# EAGLE board nhb12 (EAGLE 5.08)
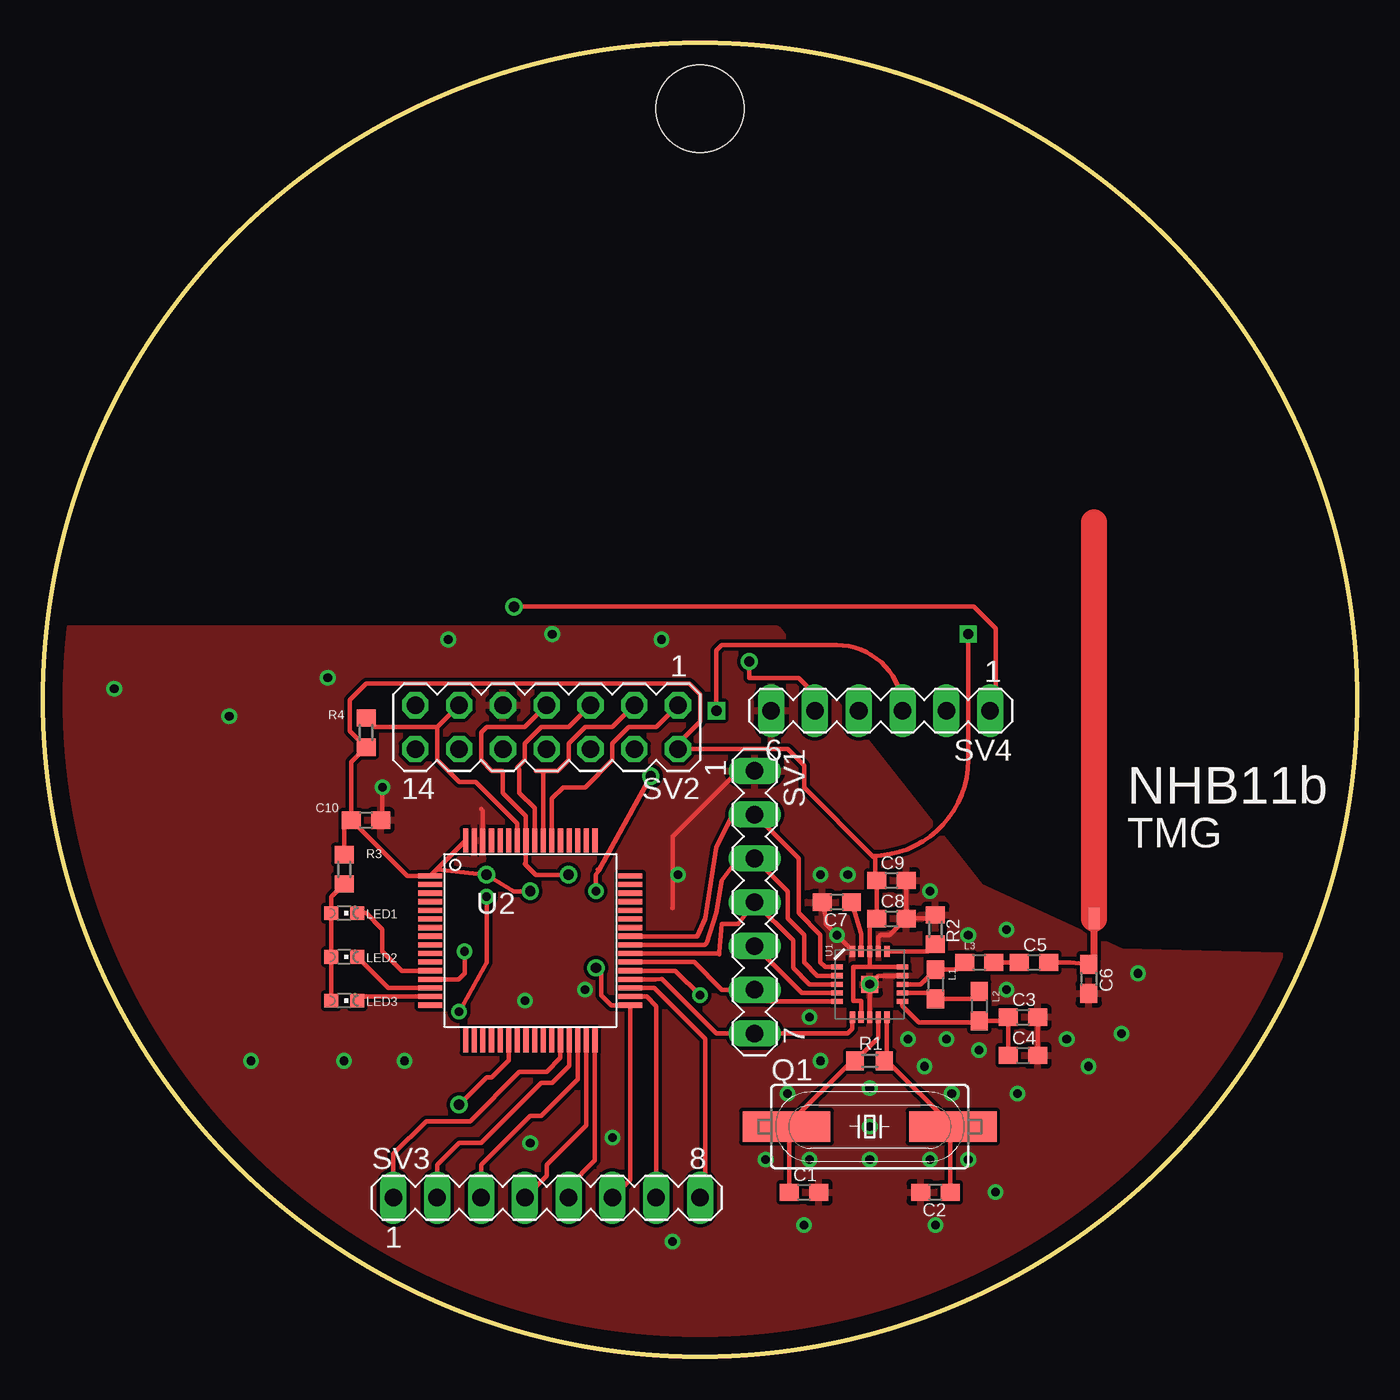
[diagram p0: board, top side]
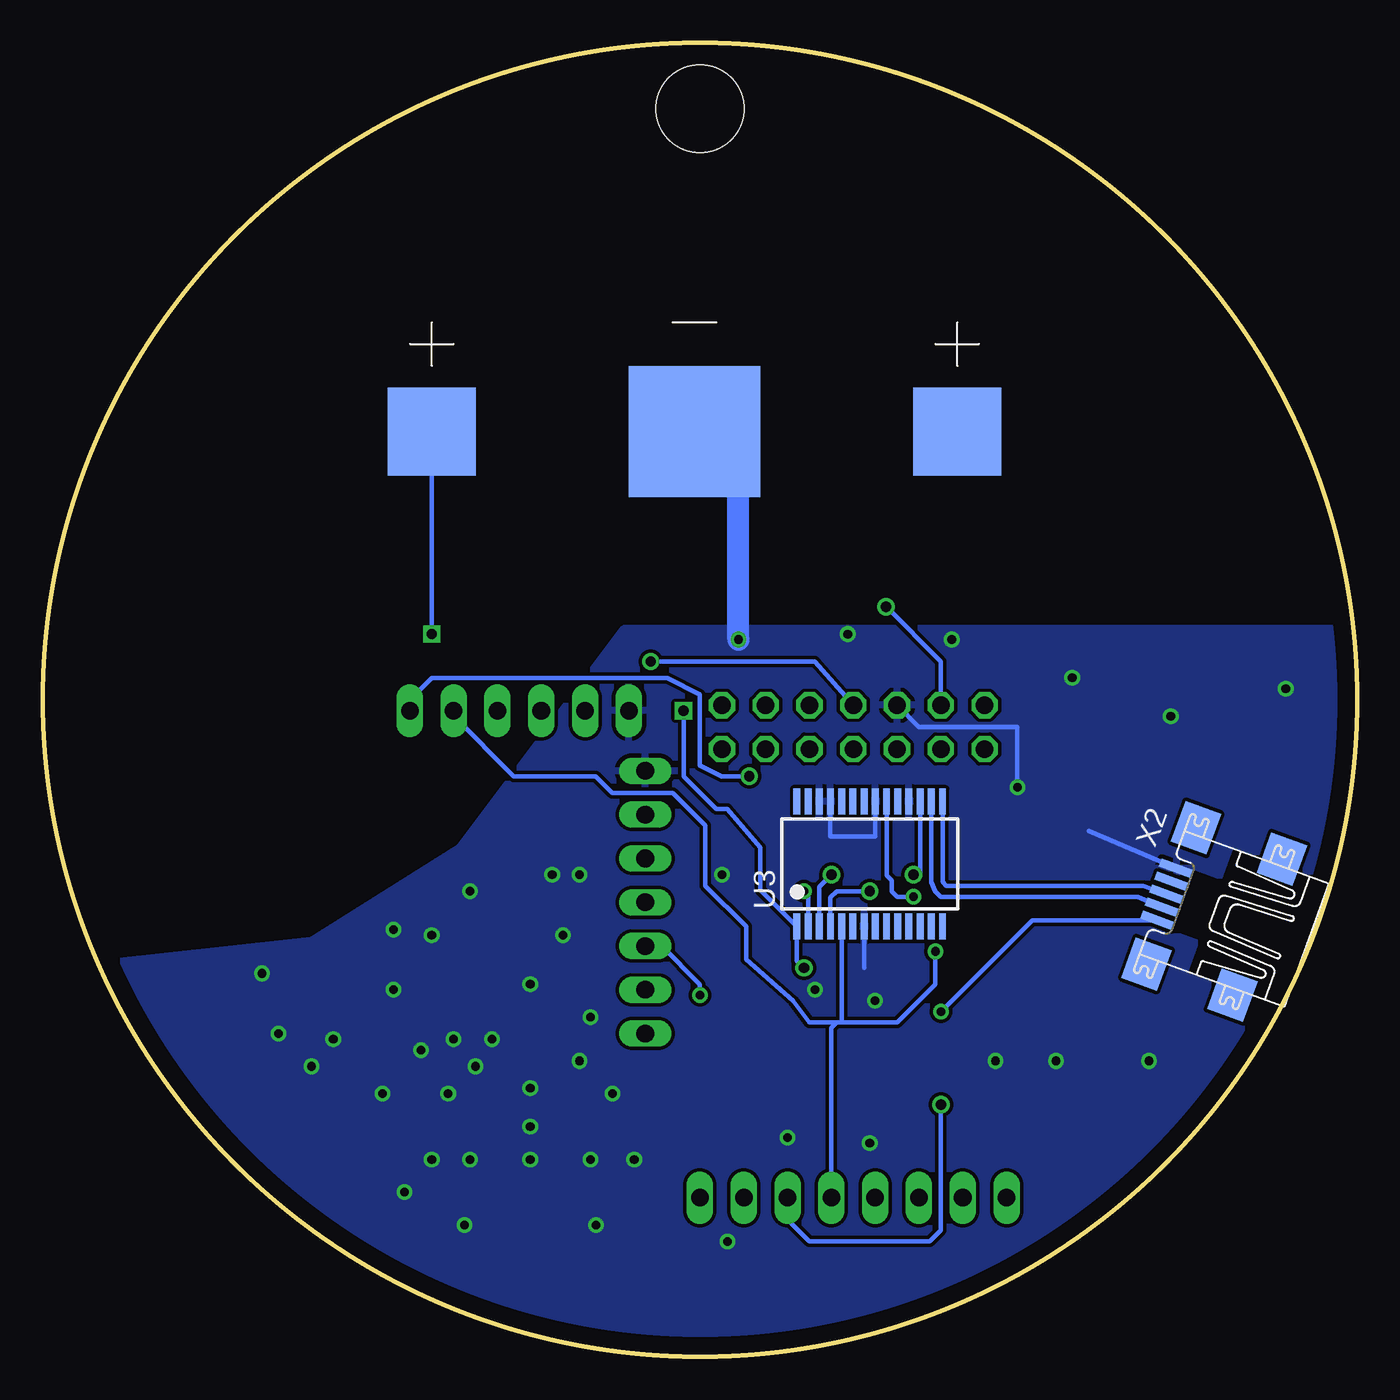
[diagram p1: board, bottom side, seen from below]

Size 76.2 x 76.2 mm. Coordinates in mm from the lower left corner, seen from the top.
Outline: circle at 38.1,38.1 radius 38.1
Copper layers (1*16): Top 0.035mm / dielectric 1.5mm / Bottom 0.035mm
Design rules "default *": minimum track width 10mil, minimum drill 8mil, track to track 8mil, track to pad 8mil, pad to pad 4mil, via to via 8mil, smd to smd 4mil, copper to edge 40mil, drill to drill 4mil, minimum pad ring 10mil, minimum via ring 8mil, stop-mask expansion 4mil, vias tented up to drill 0mil, thermal gap 10mil
Holes 5.08 mm at 38.1,72.39

## Footprints (pad centres in the part's own frame; a part is rotated, then mirrored left to right if it is on the bottom)
C0603 = smd 1.1 x 1: 1 -0.85,0; 2 0.85,0
0603 = smd 1.1 x 1: 1 -0.85,0; 2 0.85,0
CHIPLED_0603 = smd 0.8 x 0.8: A 0,-0.75; C 0,0.75
SM49 = smd 5.08 x 1.778: 1 -4.826,0; 2 4.826,0
R0603 = smd 1 x 1.1: 1 -0.85,0; 2 0.85,0
MA07-1 = drill 1.016 long: 1 -7.62,0; 2 -5.08,0; 3 -2.54,0; 4 0,0; 5 2.54,0; 6 5.08,0; 7 7.62,0
MA07-2 = drill 1.016 octagon: 1 -7.62,-1.27; 2 -7.62,1.27; 3 -5.08,-1.27; 4 -5.08,1.27; 5 -2.54,-1.27; 6 -2.54,1.27; 7 0,-1.27; 8 0,1.27; 9 2.54,-1.27; 10 2.54,1.27; 11 5.08,-1.27; 12 5.08,1.27; 13 7.62,-1.27; 14 7.62,1.27
MA08-1 = drill 1.016 long: 1 -8.89,0; 2 -6.35,0; 3 -3.81,0; 4 -1.27,0; 5 1.27,0; 6 3.81,0; 7 6.35,0; 8 8.89,0
MA06-1 = drill 1.016 long: 1 -6.35,0; 2 -3.81,0; 3 -1.27,0; 4 1.27,0; 5 3.81,0; 6 6.35,0
QFN20 = smd 1 x 1: 0 0,0 | smd 0.65 x 0.3: 1 -1.9,1; 2 -1.9,0.5; 3 -1.9,0; 4 -1.9,-0.5; 5 -1.9,-1; 11 1.9,-1; 12 1.9,-0.5; 13 1.9,0; 14 1.9,0.5; 15 1.9,1 | smd 0.3 x 0.65: 6 -1,-1.9; 7 -0.5,-1.9; 8 0,-1.9; 9 0.5,-1.9; 10 1,-1.9; 16 1,1.9; 17 0.5,1.9; 18 0,1.9; 19 -0.5,1.9; 20 -1,1.9
PM/PAG64 = smd 1.4 x 0.3: 1 -5.8,3.75; 2 -5.8,3.25; 3 -5.8,2.75; 4 -5.8,2.25; 5 -5.8,1.75; 6 -5.8,1.25; 7 -5.8,0.75; 8 -5.8,0.25; 9 -5.8,-0.25; 10 -5.8,-0.75; 11 -5.8,-1.25; 12 -5.8,-1.75; 13 -5.8,-2.25; 14 -5.8,-2.75; 15 -5.8,-3.25; 16 -5.8,-3.75; 33 5.8,-3.75; 34 5.8,-3.25; 35 5.8,-2.75; 36 5.8,-2.25; 37 5.8,-1.75; 38 5.8,-1.25; 39 5.8,-0.75; 40 5.8,-0.25; 41 5.8,0.25; 42 5.8,0.75; 43 5.8,1.25; 44 5.8,1.75; 45 5.8,2.25; 46 5.8,2.75; 47 5.8,3.25; 48 5.8,3.75 | smd 0.3 x 1.4: 17 -3.75,-5.8; 18 -3.25,-5.8; 19 -2.75,-5.8; 20 -2.25,-5.8; 21 -1.75,-5.8; 22 -1.25,-5.8; 23 -0.75,-5.8; 24 -0.25,-5.8; 25 0.25,-5.8; 26 0.75,-5.8; 27 1.25,-5.8; 28 1.75,-5.8; 29 2.25,-5.8; 30 2.75,-5.8; 31 3.25,-5.8; 32 3.75,-5.8; 49 3.75,5.8; 50 3.25,5.8; 51 2.75,5.8; 52 2.25,5.8; 53 1.75,5.8; 54 1.25,5.8; 55 0.75,5.8; 56 0.25,5.8; 57 -0.25,5.8; 58 -0.75,5.8; 59 -1.25,5.8; 60 -1.75,5.8; 61 -2.25,5.8; 62 -2.75,5.8; 63 -3.25,5.8; 64 -3.75,5.8
SSOP28 = smd 0.4 x 1.5: 1 -4.225,-3.625; 2 -3.575,-3.625; 3 -2.925,-3.625; 4 -2.275,-3.625; 5 -1.625,-3.625; 6 -0.975,-3.625; 7 -0.325,-3.625; 8 0.325,-3.625; 9 0.975,-3.625; 10 1.625,-3.625; 11 2.275,-3.625; 12 2.925,-3.625; 13 3.575,-3.625; 14 4.225,-3.625; 15 4.225,3.625; 16 3.575,3.625; 17 2.925,3.625; 18 2.275,3.625; 19 1.625,3.625; 20 0.975,3.625; 21 0.325,3.625; 22 -0.325,3.625; 23 -0.975,3.625; 24 -1.625,3.625; 25 -2.275,3.625; 26 -2.925,3.625; 27 -3.575,3.625; 28 -4.225,3.625
CR2032 = smd 7.62 x 7.62: BNEG 0,0 | smd 5.08 x 5.08: BPOS -15.24,0; BPOS2 15.24,0
ANT24 = smd 0.635 x 1.27: ANT 0,0
UX60A-MB-5ST = smd 2 x 0.5: 1 2.25,1.6; 2 2.25,0.8; 3 2.25,0; 4 2.25,-0.8; 5 2.25,-1.6 | smd 2.2 x 2.5: M1 -3.3,-4.2; M2 -3.3,4.2; M3 2,4.2; M4 2,-4.2

## Placement (x,y rotation side)
C1  22pF  [C0603]  44.13,9.53 0 top
C2  22pF  [C0603]  51.75,9.53 180 top
C3  2.2nF  [C0603]  56.83,19.69 0 top
C4  4.7pF  [C0603]  56.83,17.46 0 top
C5  1.5pF  [C0603]  57.47,22.86 0 top
C6  1.0pF  [C0603]  60.64,21.91 270 top
C7  33nF  [C0603]  46.04,26.35 180 top
C8  1nF  [C0603]  49.21,25.4 0 top
C9  10nF  [C0603]  49.21,27.62 0 top
C10  0.1µF  [C0603]  18.73,31.12 0 top
L1  8.2nH  [0603]  51.75,21.59 270 top
L2  2.7nH  [0603]  54.29,20.32 270 top
L3  3.9nH  [0603]  54.29,22.86 0 top
LED1  [CHIPLED_0603]  17.46,25.72 270 top
LED2  [CHIPLED_0603]  17.46,23.18 270 top
LED3  [CHIPLED_0603]  17.46,20.64 270 top
Q1  16MHz  [SM49]  47.94,13.34 0 top
R1  DNP  [R0603]  47.94,17.15 0 top
R2  22k  [R0603]  51.75,24.77 270 top
R3  300  [R0603]  17.46,28.26 90 top
R4  47K  [R0603]  18.73,36.2 270 top
SV1  ICE  [MA07-1]  41.27,26.35 270 top
SV2  JTAG  [MA07-2]  29.21,36.51 180 top
SV3  GPIO  [MA08-1]  29.21,9.21 0 top
SV4  BSL  [MA06-1]  48.58,37.47 180 top
U1  NRF24L01SMD  [QFN20]  47.94,21.59 0 top
U2  F261X---PM64  [PM/PAG64]  28.26,24.13 0 top
U3  FT232RL  [SSOP28]  28.26,28.58 0 bottom
U$1  CR2032  [CR2032]  38.42,53.66 0 bottom
U$2  ANT24  [ANT24]  60.96,25.4 0 top
X2  MINI-USB-UX60A-MB-5ST  [UX60A-MB-5ST]  8.89,26.04 160 bottom

## Library data of the parts
C1-C10 R1-R4 = rcl
L1-L3 U1 = SparkFun
LED1-LED3 = led
Q1 = crystal
SV1-SV4 = con-lstb
U2 = TI_MSP430_v13
U3 = ftdichip
U$1 U$2 = nhb
X2 = con-hirose

## Nets
5VCC: U3.20 X2.1
!CS: SV1.3 U1.2 U2.40
!IRQ: SV1.7 U1.6 U2.36
!RST: R4.1 SV2.11 SV4.1 U2.58 U3.2
ANT: C5.2 C6.1 U$2.ANT
CE: SV1.2 U1.1 U2.41
GND: C1.2 C2.2 C3.2 C4.2 C6.2 C7.2 C8.2 C9.2 C10.2 R2.1 SV1.1 SV2.9 SV4.6 U1.0 U1.8 U1.14 U1.17 U1.20 U2.62 U2.63 U3.7 U3.18 U3.21 U3.25 U3.26 U$1.BNEG X2.5
MISO: SV1.6 U1.5 U2.38
MOSI: SV1.5 U1.4 U2.37
N$1: C1.1 Q1.1 R1.1 U1.9
N$2: C2.1 Q1.2 R1.2 U1.10
N$3: R2.2 U1.16
N$4: C7.1 U1.19
N$5: C3.1 C4.1 L2.2 U1.11
N$6: C5.1 L3.2
N$7: L1.2 L2.1 U1.12
N$8: SV3.1 U2.28
N$9: L1.1 L3.1 U1.13
N$10: LED1.A LED2.A LED3.A R3.1
N$11: SV3.2 U2.29
N$12: LED1.C U2.12
N$13: LED3.C U2.15
N$14: LED2.C U2.14
N$15: SV3.3 U2.30
N$16: SV3.4 U2.31
N$19: SV3.7 U2.34
N$23: SV3.8 U2.35
RXD: SV3.6 SV4.3 U2.22 U2.33 U3.1
SCK: SV1.4 U1.3 U2.39
TCK: SV2.7 SV4.5 U2.57 U3.3
TDI: SV2.3 U2.55
TDO: SV2.1 U2.54
TMS: SV2.5 U2.56
TXD: SV3.5 SV4.2 U2.13 U2.32 U3.5
USBDM: U3.16 X2.2
USBDP: U3.15 X2.3
VCC: C8.1 C9.1 C10.1 R3.2 R4.2 SV2.2 U1.7 U1.15 U1.18 U2.1 U2.64 U3.4 U3.17 U$1.BPOS

## Tracks (layer width: path | path; a pad name or v marks a point on that pad's centre or on a via)
5VCC  (via drill 0.5 pad 0.25)
  Top 0.254: v25.72,26.67 25.72,22.86 v24.13,20
  Bottom 0.254: v24.13,20 18.83,25.3 X2.1 | U3.20 27.28,27.92 26.99,27.62 26.99,26.99 26.67,26.67 v25.72,26.67
!CS
  Top 0.254: U1.2 44.9,22.09 44.13,22.86 44.13,24.45 43.18,25.4 43.18,26.99 SV1.3 40.32,28.89 39.37,27.62 39.05,25.72 38.49,24 38.37,23.88 U2.40
!IRQ
  Top 0.254: U1.6 46.94,19 46.67,18.73 SV1.7 39.05,18.73 35.88,21.91 35.53,21.88 U2.36
!RST  (via drill 0.5 pad 0.25, 0.6)
  Top 0.254: 22.86,36.51 22.86,34.61 24.13,33.34 25.08,33.34 27.51,30.91 U2.58 | SV2.11 22.86,36.51 | 22.86,36.51 19.27,36.51 R4.1 | v32.07,26.99 32.07,27.94 32.22,28.21 | 32.22,28.21 v35.24,33.65 | 32.22,28.21 32.17,28.26 | v27.3,43.5 53.98,43.5 55.24,42.23 55.24,37.78 SV4.1
  Bottom 0.254: U3.2 31.83,26.75 v32.07,26.99 | v35.24,33.65 36.83,33.65 38.1,34.29 38.1,38.42 40.01,39.37 53.66,39.37 54.93,38.1 SV4.1 | SV2.11 24.13,40.32 v27.3,43.5
ANT
  Top 0.254: C5.2 59.59,22.86 C6.1
  Top 0.406: U$2.ANT 60.96,23.07 C6.1
CE
  Top 0.254: U1.1 45.35,22.59 45.09,22.86 45.09,24.45 43.81,25.72 43.81,28.89 SV1.2 40.01,31.43 39.05,29.53 38.42,25.4 37.94,24.38 U2.41
GND  (via drill 0.5, 0.5 pad 0.25)
  Top 0.254: U1.14 48.44,22.09 U1.0 U1.8 | C8.2 C9.2 | U1.17 48.44,24.31 48.58,24.45 49.11,24.45 C8.2 | C8.2 51.54,25.4 R2.1 | C4.2 C3.2 | U1.20 46.94,23.54 v46.04,24.45 45.4,25.08 45.4,25.5 C7.2 | 36.49,26.01 36.51,26.03 36.51,30.16 40.32,33.97 SV1.1 | v19.68,33.02 19.68,31.22 C10.2 | U2.62 25.51,31.64 25.4,31.75
  Bottom 0.254: SV2.9 25.4,36.51 19.68,36.51 v19.68,33.02 | X2.5 15.56,30.48 | U3.21 27.93,30.16 30.53,30.16 U3.25 | U3.7 28.58,22.55 28.58,22.54
  Bottom 0.406: 35.88,53.66 U$1.BNEG
  Bottom 1.27: v35.88,41.59 35.88,53.66
  other vias: 47.94,21.59 53.66,24.45 45.09,27.94 46.67,27.94 51.44,26.99 55.88,24.77 55.88,21.27 44.45,19.69 50.16,18.42 52.39,18.42 54.29,17.78 51.12,16.83 41.91,11.43 43.18,15.24 45.09,17.15 47.94,15.56 47.94,13.34 44.45,11.43 47.94,11.43 51.44,11.43 53.66,11.43 52.7,15.24 36.51,6.67 4.13,38.74 44.13,7.62 29.53,41.91 51.75,7.62 10.79,37.15 55.24,9.53 12.06,17.15 63.5,22.23 60.64,16.83 62.55,18.73 59.37,18.42 56.52,15.24 23.5,41.59 28.26,12.38 33.02,12.7 20.96,17.15 17.46,17.15 16.51,39.37 31.43,21.27 36.83,27.94 27.94,20.64
  pour Bottom: -0.95,42.23 42.55,42.23 52.07,29.53 60.64,24.13 75.25,22.54 75.25,-0.32 -0.95,-0.32
  pour Top: -0.95,42.23 42.55,42.23 54.29,27.31 62.55,23.5 75.25,23.18 75.25,-0.63 -0.95,-0.63
MISO
  Top 0.254: U1.5 41.96,20.59 SV1.6 39.37,21.27 37.76,22.88 U2.38
MOSI  (via drill 0.5 pad 0.25)
  Top 0.254: U1.4 44,21.09 SV1.5 | U2.37 36.67,22.38 v38.1,20.96
  Bottom 0.254: v38.1,20.96 38.1,21.59 40.32,23.81 SV1.5
N$1
  Top 0.254: U1.9 48.44,18.49 R1.1 46.93,17.14 Q1.1 43.28,13.17 C1.1
N$2
  Top 0.254: 48.94,17.3 U1.10 | 48.94,17.3 R1.2 | 48.94,17.3 48.94,17.16 Q1.2 52.6,13.17 C2.1
N$3
  Top 0.254: U1.16 51.33,23.49 R2.2
N$4
  Top 0.254: U1.19 47.44,24.53 C7.1
N$5
  Top 0.254: U1.11 49.84,20.32 50.8,19.37 54.19,19.37 L2.2 55.77,19.47 C3.1 C4.1
N$6
  Top 0.254: C5.1 L3.2
N$7
  Top 0.254: U1.12 51.4,21.09 L1.2 53.86,20.74 L2.1
N$8
  Top 0.254: U2.28 30.01,17.31 29.21,16.51 27.62,16.51 24.77,13.65 22.23,13.65 20.32,11.75 SV3.1
N$9
  Top 0.254: U1.13 50.9,21.59 L1.1 53.02,22.44 L3.1
N$10
  Top 0.254: R3.1 16.71,26.66 LED1.A LED2.A LED3.A
N$11
  Top 0.254: U2.29 30.51,16.85 29.53,15.87 28.89,15.87 25.4,12.38 24.13,12.38 22.86,11.11 SV3.2
N$12
  Top 0.254: LED1.C 18.73,25.72 19.68,24.76 19.68,23.49 20.8,22.38 U2.12
N$13
  Top 0.254: U2.15 18.46,20.88 LED3.C
N$14
  Top 0.254: 18.37,23.01 LED2.C 20.01,21.38 U2.14
N$15
  Top 0.254: U2.30 31.01,16.08 28.89,13.97 28.26,13.97 25.4,11.11 SV3.3
N$16
  Top 0.254: U2.31 31.51,13.41 29.21,11.11 29.21,10.48 SV3.4
N$19
  Top 0.254: U2.34 35,20.88 35.56,20.32 SV3.7
N$23
  Top 0.254: U2.35 35.45,21.38 38.42,18.42 38.42,9.52 SV3.8
RXD  (via drill 0.6)
  Top 0.254: 24.01,14.6 v24.13,14.6 25.72,16.19 26.03,16.19 27.01,17.17 U2.22 | v39.05,37.46 39.05,40.96 39.37,41.28 46.04,41.28 arc-90 SV4.3 | SV3.6 34.06,10.24 U2.33 32.96,20.38 32.38,20.96 32.38,22.23 v32.07,22.54
  Bottom 0.254: v24.13,14.6 24.13,7.3 24.77,6.67 31.75,6.67 33.02,7.94 SV3.6 | v39.05,37.46 39.05,33.65 37.15,31.75 36.51,31.75 34.61,29.53 34.61,27.07 U3.1 32.48,22.96 v32.07,22.54
SCK
  Top 0.254: U1.3 44.45,21.59 43.5,22.54 43.5,24.13 SV1.4 40.32,25.08 39.37,25.08 39.22,23.45 | 39.22,23.45 39.21,23.33 | U2.39 39.15,23.38 39.22,23.45
TCK  (via drill 0.6)
  Top 0.254: SV2.7 27.94,36.51 25.72,36.51 25.4,36.2 25.4,34.61 26.03,33.97 26.67,33.97 26.67,32.7 28.01,31.37 U2.57 28.01,28.64 27.94,28.57 28.58,27.94 v30.48,27.94 | SV4.5 44.77,38.42 43.81,39.37 40.96,39.37 v40.96,40.32
  Bottom 0.254: v40.96,40.32 31.43,40.32 SV2.7 | U3.3 31.18,27.24 v30.48,27.94
TDI
  Top 0.254: 28.89,33.97 28.58,33.97 | 28.89,33.97 29.84,33.97 30.48,34.61 30.48,35.56 31.43,36.51 33.02,36.51 SV2.3 | U2.55 29.01,33.86 28.89,33.97
TDO
  Top 0.254: SV2.1 35.56,36.51 33.97,36.51 33.02,35.56 33.02,34.61 31.43,33.02 30.16,33.02 29.51,32.36 U2.54
TMS
  Top 0.254: SV2.5 30.48,36.51 28.89,36.51 27.94,35.56 27.94,34.61 27.51,34.17 27.62,34.06 27.62,32.7 28.51,31.82 U2.56
TXD  (via drill 0.5 pad 0.25)
  Top 0.254: 24.43,23.51 v24.45,23.49 24.45,22.23 24.1,21.88 U2.13 | SV3.5 30.48,9.84 32.01,11.37 U2.32
  Bottom 0.254: v24.45,23.49 24.45,21.59 26.67,19.37 29.84,19.37 | 30.16,19.37 31.75,19.37 32.7,20.64 35.43,23.05 35.43,24.95 37.78,27.3 37.78,30.8 39.69,32.7 43.18,32.7 44.13,33.65 48.9,33.65 52.39,37.15 SV4.2 | 30.16,19.37 29.84,19.37 | 30.16,19.37 30.48,19.05 SV3.5 | U3.5 29.88,19.41 29.84,19.37
USBDM
  Bottom 0.254: U3.16 24.68,27.54 24.45,26.99 24.13,26.67 12.7,26.67 X2.2
USBDP
  Bottom 0.254: U3.15 24.03,27.53 23.81,27.3 12.38,27.3 X2.3
VCC  (via drill 0.6)
  Top 0.254: 47.94,22.59 46.99,22.59 46.99,20.64 47.44,20.64 U1.7 | 47.94,22.59 U1.15 | 47.94,22.59 U1.18 47.94,24.98 C8.1 C9.1 48.26,27.73 48.26,28.89 48.1,29.05 | R3.2 17.46,30.69 C10.1 | C10.1 17.88,34.49 R4.2 17.78,36.3 17.78,38.1 18.73,39.05 37.47,39.05 38.1,38.42 38.1,36.83 36.83,35.56 SV2.2 43.18,35.24 44.13,34.29 44.13,33.02 48.1,29.05 | v53.66,41.91 53.66,34.61 arc-90 48.1,29.05 | C10.1 21.12,27.88 U2.1 22.85,28.27 | 22.85,28.27 U2.64 | v28.26,26.99 27.3,26.99 v25.72,27.94 22.86,28.26 22.85,28.27
  Bottom 0.254: v53.66,41.91 U$1.BPOS | U3.4 30.53,26.62 30.16,26.99 v28.26,26.99 | U3.17 25.33,28.01 v25.72,27.94

## Text on the board
tNames: NHB11b | TMG